# EAGLE board VenusGPS (EAGLE 6.1)
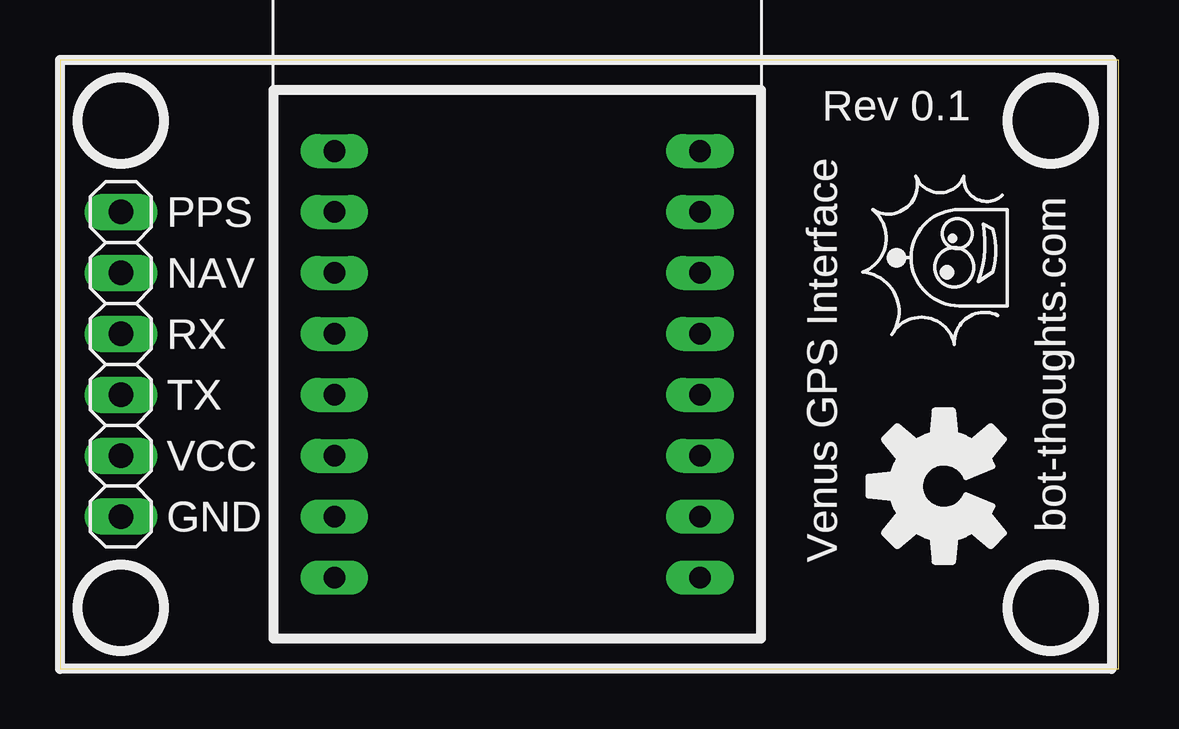
[diagram p0: board, top side]
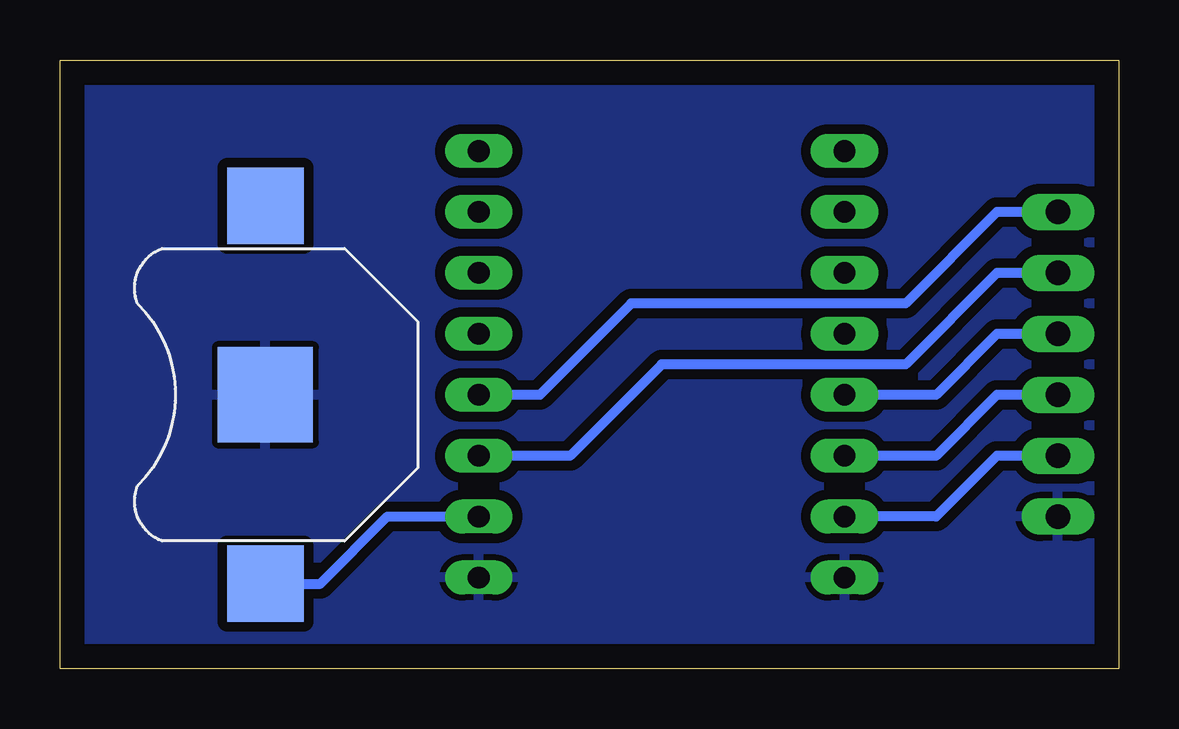
[diagram p1: board, bottom side, seen from below]

Size 44.12 x 25.39 mm. Coordinates in mm from the lower left corner, seen from the top.
Outline: 0,0 44.12,0 44.12,25.39 0,25.39 0,0
Copper layers (1*16): Top 0.035mm / dielectric 1.5mm / Bottom 0.035mm
Design rules: minimum track width 10mil, minimum drill 24mil, track to track 8mil, track to pad 8mil, pad to pad 8mil, via to via 8mil, smd to smd 8mil, copper to edge 40mil, drill to drill 8mil, minimum pad ring 10mil, minimum via ring 8mil, stop-mask expansion 4mil, vias tented up to drill 0mil, thermal gap 10mil

## Footprints (pad centres in the part's own frame; a part is rotated, then mirrored left to right if it is on the bottom)
BATTCON_12MM = smd 3.962 x 3.962: GND 0,0 | smd 3.175 x 3.175: PWR@1 -7.874,0; PWR@2 7.874,0
1X02 = drill 1.016 long: 1 -1.27,0; 2 1.27,0
1X04 = drill 1.016 long: 1 -3.81,0; 2 -1.27,0; 3 1.27,0; 4 3.81,0
VENUS6 = drill 0.9 long: P1 -7.62,8.89; P2 -7.62,6.35; P3 -7.62,3.81; P4 -7.62,1.27; P5 -7.62,-1.27; P6 -7.62,-3.81; P7 -7.62,-6.35; P8 -7.62,-8.89; P9 7.62,-8.89; P10 7.62,-6.35; P11 7.62,-3.81; P12 7.62,-1.27; P13 7.62,1.27; P14 7.62,3.81; P15 7.62,6.35; P16 7.62,8.89

## Placement (x,y rotation side)
BAT1  [BATTCON_12MM]  35.56,11.43 90 bottom
JP1  [1X02]  2.54,17.78 270 top
JP3  [1X04]  2.54,10.16 270 top
U$1  VENUS6_GPS_11058  [VENUS6]  19.05,12.7 0 top

## Library data of the parts
BAT1 = SparkFun; BOM: INCLUDE; PARTNO: 3000
JP1 JP3 = pinhead-2; BOM: EXCLUDE
U$1 = mes; BOM: EXCLUDE

## Nets
3.3V: JP3.3 U$1.P7
CLK: U$1.P3
CS: U$1.P4
GND: BAT1.GND JP3.4 U$1.P8 U$1.P9
MISO: U$1.P2
MOSI: U$1.P1
NAV: JP1.2 U$1.P11
PPS: JP1.1 U$1.P12
RX0: JP3.1 U$1.P5
TX0: JP3.2 U$1.P6
VBAT: BAT1.PWR@1 U$1.P10

## Tracks (layer width: path | path; a pad name or v marks a point on that pad's centre or on a via)
3.3V
  Bottom 0.406: JP3.3 5.08,8.89 7.62,6.35 U$1.P7
GND
  pour Bottom (isolate 0.406, rank 2): 0,25.4 44.45,25.4 44.45,0 0,0
NAV
  Bottom 0.406: JP1.2 5.08,16.51 8.89,12.7 19.05,12.7 22.86,8.89 U$1.P11
PPS
  Bottom 0.406: JP1.1 5.08,19.05 8.89,15.24 20.32,15.24 24.13,11.43 U$1.P12
RX0
  Bottom 0.406: JP3.1 5.08,13.97 7.62,11.43 U$1.P5
TX0
  Bottom 0.406: JP3.2 5.08,11.43 7.62,8.89 U$1.P6
VBAT
  Bottom 0.406: BAT1.PWR@1 33.27,3.56 30.48,6.35 U$1.P10

## Text on the board
tNames: Rev 0.1 | PPS | NAV | RX | TX | VCC | GND | bot-thoughts.com | Venus GPS Interface
_tsilk: Rev 0.1 | PPS | NAV | RX | TX | VCC | GND | bot-thoughts.com | Venus GPS Interface